# Altium PCB LowerPlumbingBayBoardPCB.PcbDoc (part 2 of 2)
Units mm, origin at the board's own origin, x right, y up, seen from the top; angles counter-clockwise.
Board outline 88.9 x 76.2 mm, 4 copper layers (Top Layer, GND, PWR, Bottom Layer), stack 1.586 mm thick; 63 components, 48 nets, 259 pads, 203 vias.
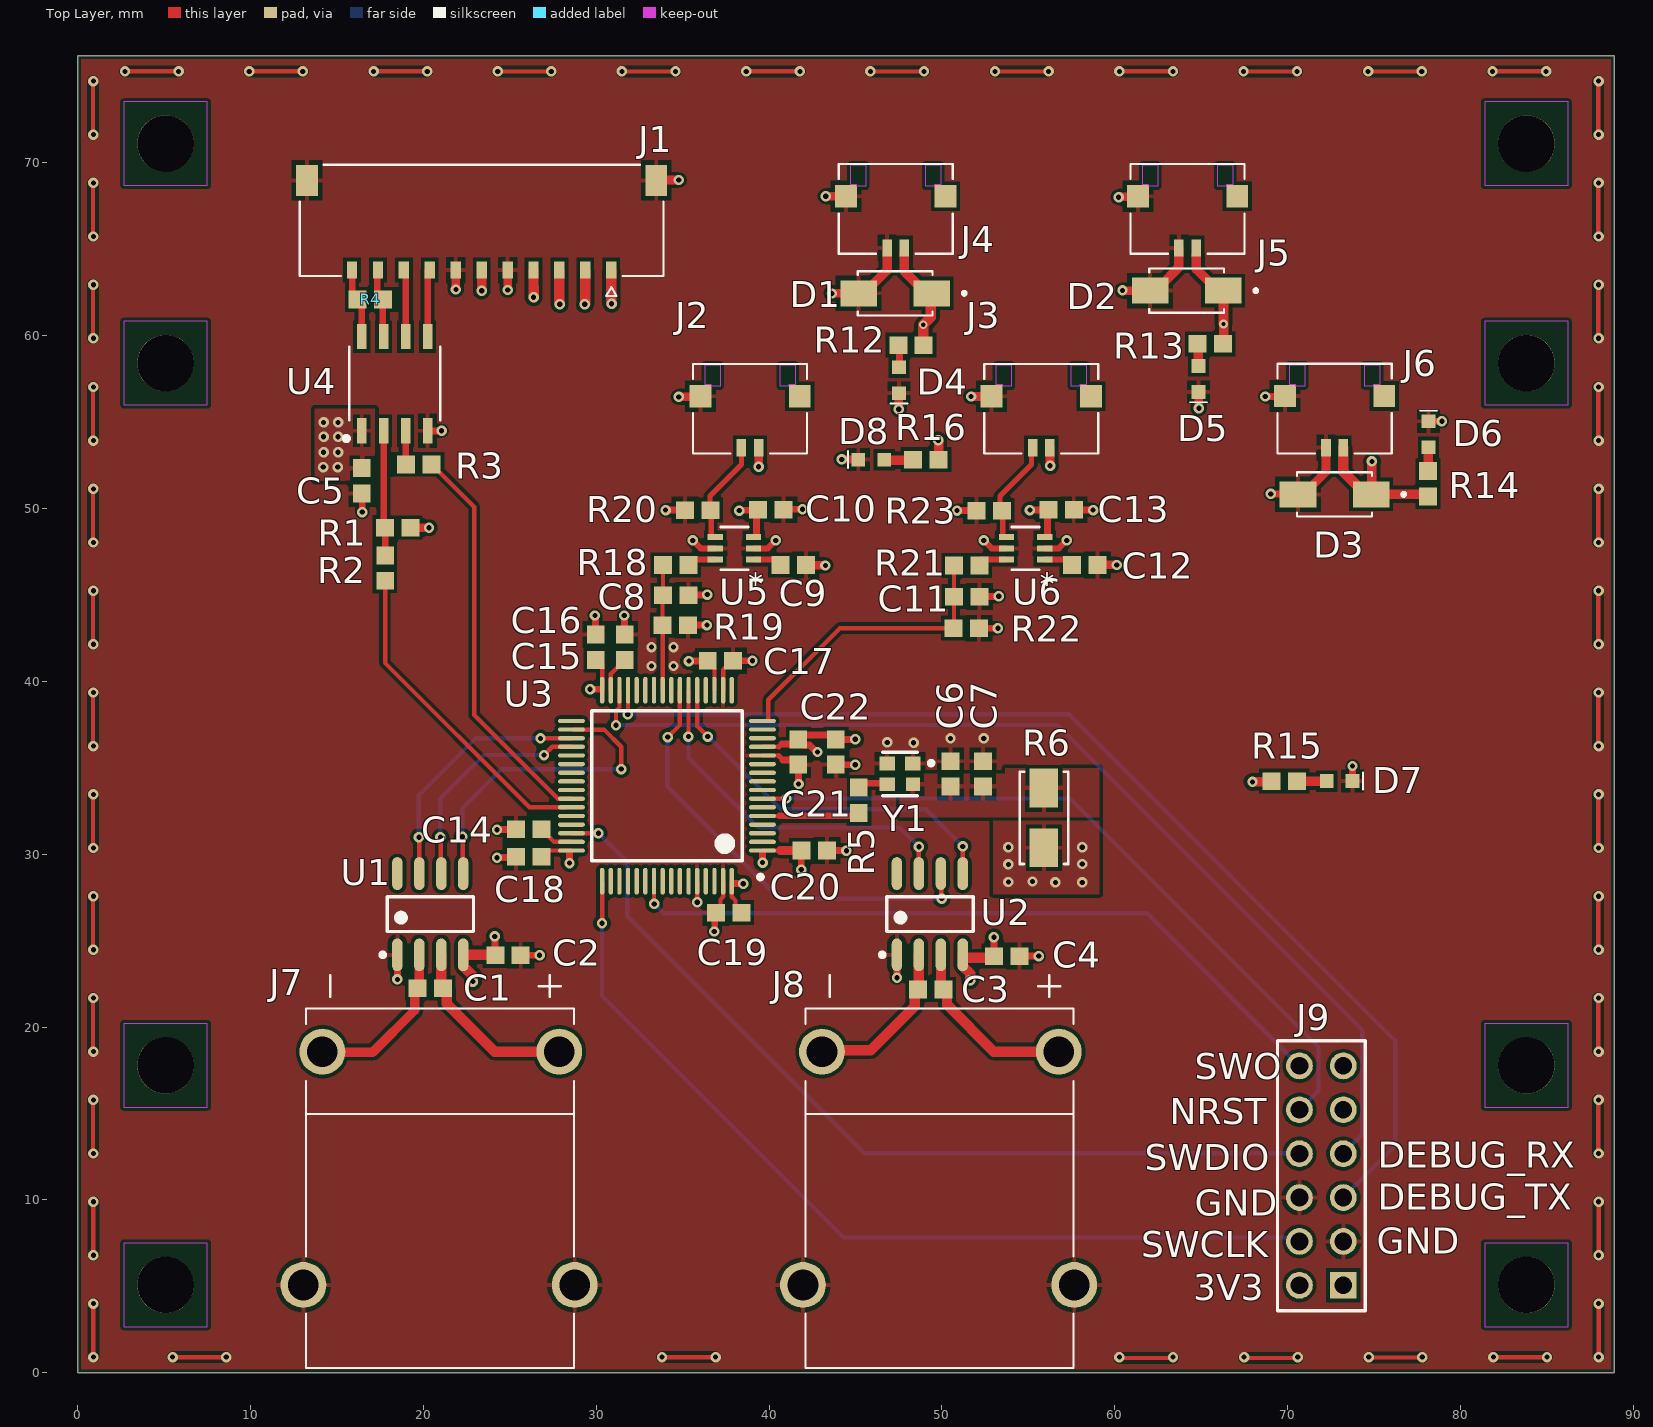
[diagram p0: Top Layer view]

## Via types
v1: diameter 0.6, hole 0.3, Top Layer to Bottom Layer, tented both sides, 201 vias
v2: diameter 0.5, hole 0.25, Top Layer to Bottom Layer, 2 vias

## Nets (pads, with @x,y where several pads share a name; then routed paths per layer and width w, separated by ;. In a path a pad name is that pad's centre, name@x,y a point inside that pad or via, vN(x,y) a via of type N, cw(c..) or ccw(c..) an arc to the next point about the centre after c; other vN are vias at no path point) (continued)
GND: (continued)
  other v1: 60.272,0.9 63.372,0.9 67.485,0.9 70.585,0.9 74.699,0.9 77.799,0.9 0.9,12.686 88,12.686 0.9,15.786 88,15.786 0.9,18.578 88,18.578 0.9,21.678 88,21.678 0.9,24.471 88,24.471 0.9,27.571 88,27.571 0.9,30.364 88,30.364 0.9,33.464 88,33.464 0.9,36.257 88,36.257 48.362,36.449 46.838,36.474 50.495,36.703 52.426,36.703 0.9,39.357 88,39.357 33.198,40.894 34.468,40.894 33.198,41.986 34.468,41.986 0.9,42.15 88,42.15 0.9,45.25 88,45.25 0.9,48.042 88,48.042 0.9,51.142 88,51.142 0.9,53.935 88,53.935 0.9,57.035 88,57.035 0.9,59.853 88,59.853 0.9,62.953 88,62.953 0.9,65.746 88,65.746 0.9,68.846 88,68.846 0.9,71.639 88,71.639 0.9,74.739 88,74.739 24.296,75.3 27.396,75.3 31.484,75.3 34.584,75.3 45.86,75.3 48.96,75.3 53.074,75.3 56.174,75.3 67.45,75.3 70.55,75.3 74.664,75.3 77.764,75.3
NetC6_2: C6.2 C7.2 R6.1 Y1.4
NetC9_1: C9.1 U5.1 | length 1.5
  Top Layer w0.35: U5.1 39.106,47.048 40.48,47.048 C9.1@40.564,46.965
NetC12_1: C12.1 U6.1 | length 1.7
  Top Layer w0.35: U6.1 55.953,47.048 57.447,47.048 C12.1@57.531,46.965
  Top Layer w0.6: C12.1@57.496,46.773 C12.1
NetC14_1: C14.1 U3.47 | length 1.9
  Top Layer w0.25: C14.1@26.899,31.369 26.907,31.369 27.216,31.06 27.216,31.052 27.553,30.715 U3.47
NetC15_2: C15.2 U3.31 | length 2.1
  Top Layer w0.25: U3.31 30.839,40.432 31.623,41.216 C15.2@31.623,41.25
NetD4_2: D4.2 R12.2 | length 1.5
  Top Layer w0.4: D4.2@47.537,58.064 R12.2@47.537,59.602
NetD5_2: D5.2 R13.2 | length 1.5
  Top Layer w0.55: D5.2@64.77,58.191 64.846,58.268 R13.2@64.846,59.641 ; D5.2@64.846,58.331 D5.2@64.871,58.306
NetD6_2: D6.2 R14.2 | length 1.1
  Top Layer w0.55: R14.2 78.155,52.195 D6.2@78.155,53.235
NetD7_2: D7.2 R15.2 | length 1.5
  Top Layer w0.55: R15.2@70.691,34.23 72.161,34.23 D7.2@72.161,34.214
NetD8_2: D8.2 R16.2 | length 1.6
  Top Layer w0.55: D8.2@46.78,52.798 46.785,52.799 48.093,52.799 R16.2
NetR1_1: R1.1 R2.2 U4.2 | length 7.3
  Top Layer w0.381: U4.2 17.698,48.971 17.78,48.971 17.78,47.32 R2.2@17.755,47.32
NetR3_2: R3.2 U4.3 | length 1.9
  Top Layer w0.381: U4.3 18.968,52.872 19.166,52.675 R3.2@19.197,52.675
NetR5_2: R5.2 Y1.3 | length 1.6
  Top Layer w0.368: R5.2@45.31,34.115 Y1.3@46.739,34.115
  Top Layer w0.5: R5.2@45.189,33.994 R5.2@45.31,34.115
NetR18_1: R18.1 U5.6 | length 1.4
  Top Layer w0.35: R18.1@35.484,47.051 U5.6
NetR21_1: R21.1 U6.6 | length 1.7
  Top Layer w0.35: R21.1@52.121,46.939 52.23,47.048 53.725,47.048 U6.6
NRST: J9.10 U3.7 | length 42.1
  Top Layer w0.25: U3.7 40.987,33.215 v1(40.996,33.223)
  Bottom Layer w0.25: v1(40.996,33.223) 57.404,33.223 71.788,18.839 71.788,16.315 70.809,15.336 J9.10@70.809,15.263
OSC_IN: R5.1 U3.5 | length 5.9
  Top Layer w0.25: U3.5 40.574,32.215 40.582,32.222
  Top Layer w0.368: 40.582,32.222 45.125,32.222 R5.1@45.161,32.258 ; R5.1@45.017,32.207 R5.1 ; R5.1@45.219,32.215 R5.1@45.263,32.258
PT18_ADC: C8.1 R18.2 R19.2 U3.25 | length 7.1
  Top Layer w0.25: R19.2 33.834,44.934 C8.1@33.884,44.983 ; U3.25 R19.2@33.839,43.129 ; C8.1 33.86,46.712 R18.2@33.884,46.736
PT18_OUT: J2.2 R20.1 U5.4 | length 6
  Top Layer w0.3: R20.1@36.574,49.733 36.574,50.722 38.4,52.548 J2.2 ; R20.1@36.652,49.606 36.652,48.379 36.68,48.351 U5.4
PT19_ADC: C11.1 R21.2 R22.2 U3.16 | length 17.7
  Top Layer w0.25: U3.16 39.954,37.715 39.954,38.938 44.094,43.078 R22.2@50.698,43.078 ; R22.2@50.698,43.028 50.7,43.028 R21.2
PT19_OUT: J3.2 R23.1 U6.4 | length 6.3
  Top Layer w0.3: R23.1@53.362,49.708 R23.1@53.362,50.163 ; 53.364,50.722 55.189,52.548 J3.2@55.189,53.513 ; U6.4@53.518,48.379 R23.1@53.518,49.606 ; R23.1@53.362,50.163 53.362,50.697 R23.1@53.362,50.163
RX_N: J1.10 R4.1 U4.7 | length 4
  Top Layer w0.381: R4.1@17.315,62.075 17.315,63.805 J1.10 ; R4.1 17.651,59.954 U4.7
RX_P: J1.11 R4.2 U4.8 | length 4.1
  Top Layer w0.381: R4.2@15.868,62.075 J1.11 ; R4.2 16.428,62.103 U4.8
"SOL12 PWR": D1.C J1.1 J4.1 R12.1 | length 27
  Top Layer w0.55: J4.1@47.828,64.821 47.828,63.729 48.623,62.934 48.625,62.934 49.098,62.46 D1.C@49.098,62.459 ; D1.C D1.C@49.72,62.459
  Top Layer w0.6: J1.1 30.868,61.867 v1(30.886,61.849) ; R12.1@48.895,59.487 48.92,59.487 v2(48.92,60.63) 49.352,61.062 49.352,62.009 49.1,62.261 D1.C@49.1,62.459
  PWR w0.6: v1(30.886,61.849) 32.106,60.63 v2(48.92,60.63)
"SOL13 PWR": D2.C J1.2 J5.1 R13.1 | length 46.5
  Top Layer w0.55: v1(29.337,61.824) v1@29.368,61.855 ; J5.1@64.719,64.745 64.719,63.857 65.965,62.611 D2.C D2.C@66.585,62.611 ; R13.1@66.294,59.565 v2(66.294,60.681)
  Top Layer w0.6: v1@29.368,61.855 J1.2 ; v2(66.294,60.681) D2.C@66.294,62.136
  PWR w0.6: v1(29.337,61.824) 32.004,59.157 64.77,59.157 v2(66.294,60.681)
"SOL14 PWR": D3.C J1.3 J6.1 R14.1 | length 62.7
  Top Layer w0.55: v1@27.868,61.845 v1(27.889,61.824) ; D3.C 77.978,50.825 R14.1@77.978,50.724 ; D3.C@74.879,50.8 v1(74.879,52.73)
  Top Layer w0.6: v1@27.868,61.845 J1.3 ; J6.1 73.225,52.126 74.576,50.775 D3.C@74.85,50.775
  PWR w0.6: v1(27.889,61.824) 27.889,61.417 31.801,57.506 71.739,57.506 74.879,54.365 v1(74.879,52.73)
SPI1_MISO: U2.U7 U3.22 | length 20.9
  Top Layer w0.25: v1@35.339,36.812 U3.22 ; U2.U7 v1(48.666,30.429)
  Bottom Layer w0.25: v1(35.331,36.805) 35.331,35.587 39.371,31.547 47.549,31.547 v1(48.666,30.429)
SPI1_SCK: U2.U5 U3.21 | length 21.3
  Top Layer w0.25: U3.21@35.839,38.938 35.839,37.414 v1(36.449,36.805) ; U2.U5 v1(51.206,30.455)
  Bottom Layer w0.25: v1(36.449,36.805) 36.474,36.805 40.681,32.598 49.063,32.598 v1(51.206,30.455)
SPI2_MISO: U1.U7 U3.35 | length 14.7
  Top Layer w0.25: v1(19.736,30.988) 19.748,30.975 19.748,28.894 U1.U7 ; v1@26.783,36.715 U3.35
  Bottom Layer w0.25: v1(19.736,30.988) 19.736,33.426 23.012,36.703 v1(26.772,36.703)
SPI2_SCK: U1.U5 U3.34 | length 18.4
  Top Layer w0.25: v1(22.25,31.013) 22.276,30.988 22.276,28.906 U1.U5 ; U3.34@28.702,37.211 30.455,37.211 31.445,36.22 v1(31.445,34.925)
  Bottom Layer w0.25: v1(22.25,31.013) 22.25,32.664 24.511,34.925 v1(31.445,34.925)
SWCLK: J9.4 U3.49 | length 53.5
  Top Layer w0.25: v1(30.328,26.01) 30.339,26.021 U3.49
  Bottom Layer w0.25: v1(30.328,26.01) 30.328,21.793 44.298,7.823 J9.4@71.292,7.823 ; J9.4@70.663,7.671 J9.4@70.764,7.671
SWDIO: J9.8 U3.46 | length 51.6
  Top Layer w0.25: U3.46 30.122,31.215 v1(30.124,31.217)
  Bottom Layer w0.25: v1(30.124,31.217) 31.801,29.54 31.801,26.416 45.517,12.7 70.637,12.7 J9.8@70.663,12.675
SWO: J9.12 U3.55 | length 42.6
  Top Layer w0.25: U3.55 33.339,27.138 v1(33.35,27.127)
  Bottom Layer w0.25: v1(33.35,27.127) 33.884,26.594 61.849,26.594 J9.12@70.764,17.678
"TC11 V+": C1.1 J7.P U1.U3 | length 10.2
  Top Layer w0.6: U1.U3 21.031,22.352 C1.1@21.057,22.327 ; C1.1@21.349,22.25 21.349,21.351 24.125,18.575 27.45,18.575 J7.P@27.55,18.675
"TC11 V-": C1.2 J7.N U1.U2 | length 8.5
  Top Layer w0.55: J7.N@15.175,18.55 17.075,18.55 19.494,20.97 C1.2@19.494,22.25 ; U1.U2 19.752,24.171 19.752,22.438 C1.2@19.837,22.352
TC11_CS!: U1.U6 U3.36 | length 13.2
  Top Layer w0.25: v1(20.98,30.988) 21.006,30.963 21.006,28.906 U1.U6 ; v1(26.975,35.738) 27.452,36.215 U3.36
  Bottom Layer w0.25: v1(20.98,30.988) 20.98,33.223 23.495,35.738 v1(26.975,35.738)
"TC12 V+": C3.1 J8.P U2.U3 | length 10.1
  Top Layer w0.6: U2.U3@49.95,23.525 49.95,22.311 C3.1 50.296,21.965 50.296,21.794 50.292,21.789 50.292,21.456 50.296,21.452 50.296,21.281 53.002,18.575 J8.P J8.P@56.875,18.575
"TC12 V-": C3.2 J8.N U2.U2 | length 9.2
  Top Layer w0.6: J8.N@43.45,18.475 43.642,18.667 45.892,18.667 48.425,21.2 48.425,22.174 48.456,22.174 48.666,22.384 U2.U2
TC12_CS!: U2.U6 U3.23 | length 25.9
  Top Layer w0.25: v1(34.138,36.779) 34.839,37.481 U3.23 ; U2.U6 49.962,28.855 49.962,27.457 v1(49.987,27.432)
  Bottom Layer w0.25: v1(34.138,36.779) 34.105,36.746 34.105,33.917 40.589,27.432 v1(49.987,27.432)
TX_N: J1.9 U4.6 | length 4
  Top Layer w0.381: J1.9 18.968,63.805 U4.6
TX_P: J1.8 U4.5 | length 4
  Top Layer w0.381: U4.5 20.238,63.805 J1.8
pads on no net: J2.S1 J3.S1 J4.S1 J5.S1 J6.S1 J9.1 J9.9 J9.11 U1.U8 U2.U8 U3.2 U3.3 U3.4 U3.6 U3.8 U3.9 U3.10 U3.11 U3.14 U3.15 U3.17 U3.20 U3.24 U3.26 U3.27 U3.28 U3.33 U3.37 U3.38 U3.39 U3.40 U3.41 U3.44 U3.45 U3.50 U3.51 U3.52 U3.53 U3.54 U3.56 U3.57 U3.58 U3.59 U3.61 U3.62

## Polygon pours and split planes (outlines as drawn)
+12 on PWR "+12_L03_P007" (solid, pour order 7): 25.654,62.738 25.654,51.054 58.166,51.054 58.166,54.991 27.178,54.991 27.178,62.738
+3V3 on PWR "+3V3_L03_P005" (solid, pour order 5): 24.003,76.2 0,76.2 0,0 88.9,0 88.9,46.355 66.421,46.355 66.421,51.054 24.003,51.054 24.003,50.165
GND on PWR "GND_L03_P008" (solid, pour order 8): 24.003,76.2 24.003,51.054 66.421,51.054 66.421,46.355 88.9,46.355 88.9,76.2
GND on Top Layer "GND_L01_P014" (solid, pour order 14): 0,76.2 0,0 88.9,0 88.9,76.2
+3V3 on Top Layer "+3V3_L01_P013" (solid, pour order 13): 17.196,51.613 17.196,55.778 13.716,55.778 13.716,51.613
+3V3 on Top Layer "+3V3_L01_P012" (solid, pour order 12): 52.959,27.686 59.106,27.686 59.106,32.131 52.959,32.131
NetC6_2 on Top Layer "NETC6_2_L01_P011" (solid, pour order 11): 47.574,34.646 47.574,32.131 59.106,32.131 59.106,34.976 53.67,34.976 53.67,34.646
GND on GND "GND_L02_P000" (solid, pour order 0): 0,0 88.9,0 88.9,76.2 0,76.2
GND on Bottom Layer "GND_L04_P015" (solid, pour order 15): 0,76.2 88.9,76.2 88.9,0 0,0

## Keep-outs
Top Layer:
  rectangle: 81.407,2.667 86.233,7.493
  rectangle: 81.407,15.367 86.233,20.193
  rectangle: 2.667,15.367 7.493,20.193
  rectangle: 2.667,56.007 7.493,60.833
  rectangle: 81.407,68.707 86.233,73.533
  rectangle: 81.407,56.007 86.233,60.833
  rectangle: 2.667,2.667 7.493,7.493
  rectangle: 2.667,68.707 7.493,73.533

## Silkscreen, mask and mechanical layers (free items; w line width, h text height)
Top Overlay:
  text "SWO" at 64.643,16.993 h1.52
  text "NRST" at 63.17,14.376 h1.52
  text "DEBUG_RX" at 75.209,11.862 h1.52
  text "SWDIO" at 61.747,11.709 h1.52
  text "DEBUG_TX" at 75.209,9.423 h1.52
  text "GND" at 64.618,9.068 h1.52
  text "GND" at 75.159,6.883 h1.52
  text "SWCLK" at 61.544,6.68 h1.52
  text "3V3" at 64.541,4.191 h1.52

## Text inside footprints (layer, text, board x,y; h text height)
U4: Top 3D Body "*" at 17.178,55.299 h1.27 r90
U5: Top 3D Body "*" at 38.602,47.942 h1.27 r180; Top Overlay "*" at 39.675,46.823 h1.27 r180
U6: Top 3D Body "*" at 55.448,47.942 h1.27 r180; Top Overlay "*" at 56.521,46.822 h1.27 r180